# EAGLE board CBMINI (EAGLE 9.5.2)
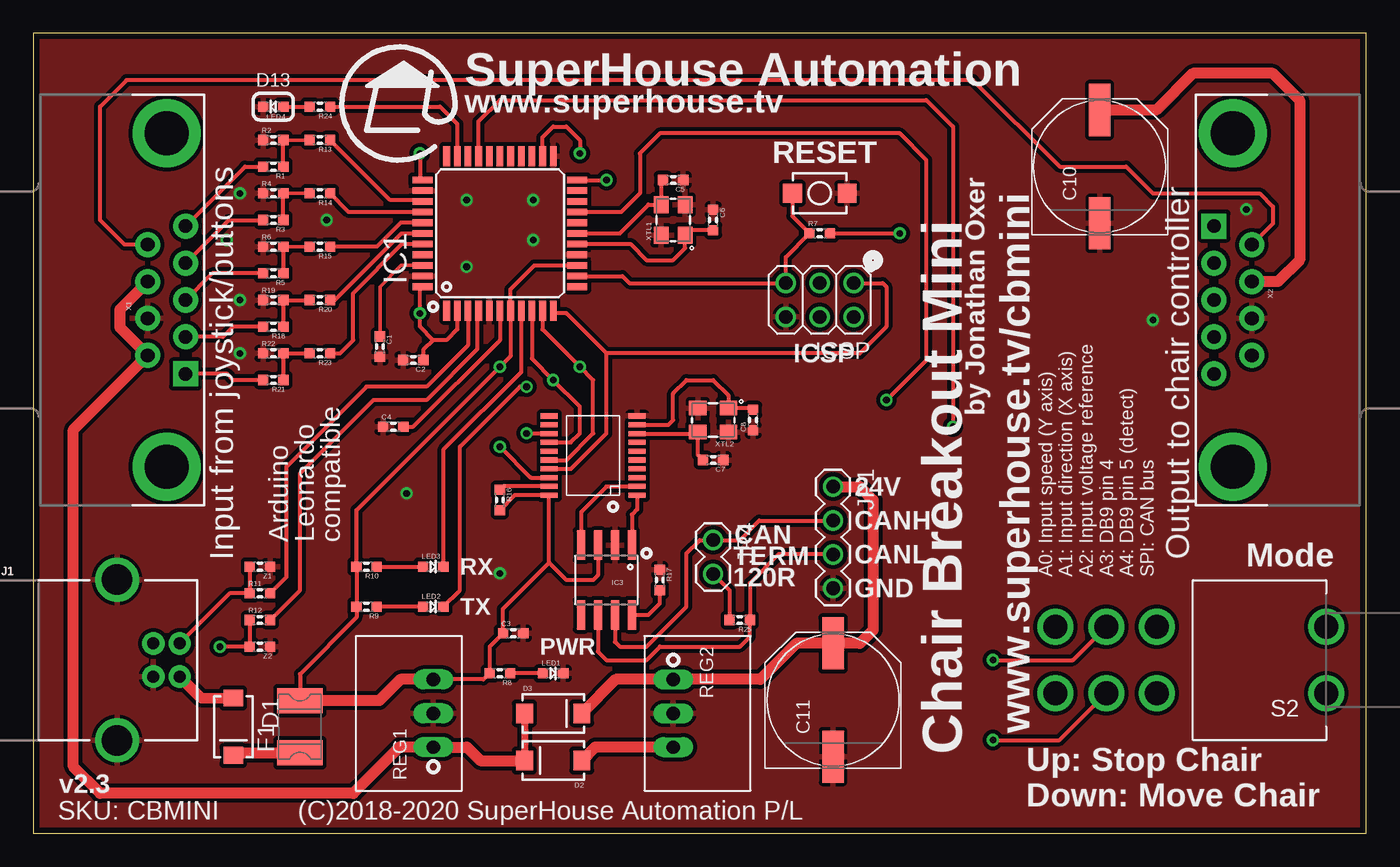
[diagram p0: board, top side]
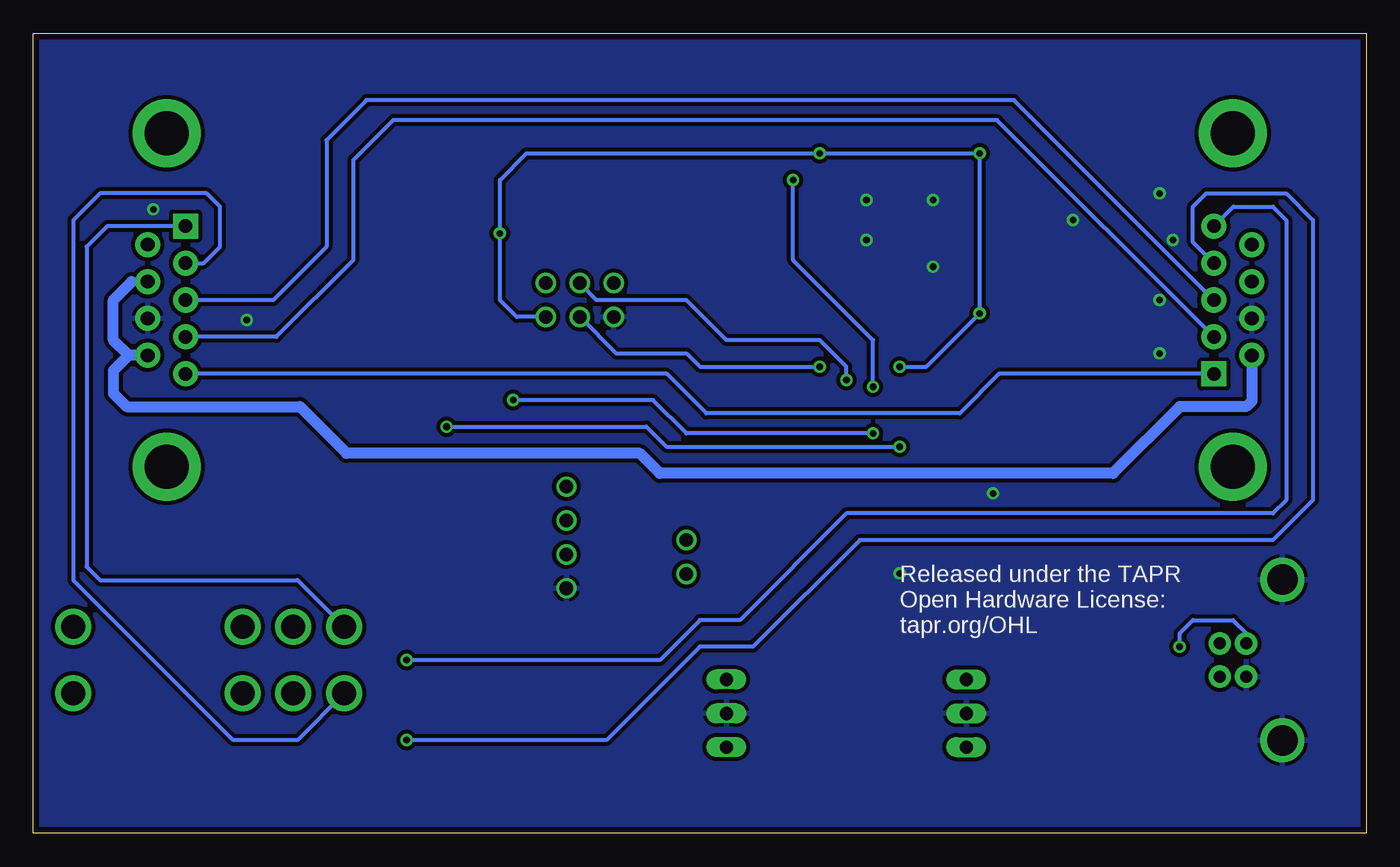
[diagram p1: board, bottom side, seen from below]

Size 100 x 60 mm. Coordinates in mm from the lower left corner, seen from the top.
Outline: 100,60 0,60 0,0 100,0 100,60
Copper layers (1*16): Top 0.035mm / dielectric 1.5mm / Bottom 0.035mm
Design rules "default *": minimum track width 10mil, minimum drill 24mil, track to track 12mil, track to pad 12mil, pad to pad 12mil, via to via 12mil, smd to smd 8mil, copper to edge 18mil, drill to drill 8mil, minimum pad ring 10mil, minimum via ring 8mil, stop-mask expansion 4mil, vias tented up to drill 0mil, thermal gap 10mil

## Footprints (pad centres in the part's own frame; a part is rotated, then mirrored left to right if it is on the bottom)
C0603 = smd 0.762 x 0.762: 1 -0.762,0; 2 0.762,0
PANASONIC_G = smd 3.9 x 1.6: + 4.25,0; - -4.25,0
SMA-DIODE = smd 1.27 x 1.47: A -2.15,0; C 2.15,0
1812 = smd 1.9 x 3.4: 1 -1.95,0; 2 1.95,0
TQFP44 = smd 1.5 x 0.5: 1 -5.8,4; 2 -5.8,3.2; 3 -5.8,2.4; 4 -5.8,1.6; 5 -5.8,0.8; 6 -5.8,0; 7 -5.8,-0.8; 8 -5.8,-1.6; 9 -5.8,-2.4; 10 -5.8,-3.2; 11 -5.8,-4; 23 5.8,-4; 24 5.8,-3.2; 25 5.8,-2.4; 26 5.8,-1.6; 27 5.8,-0.8; 28 5.8,0; 29 5.8,0.8; 30 5.8,1.6; 31 5.8,2.4; 32 5.8,3.2; 33 5.8,4 | smd 0.5 x 1.5: 12 -4,-5.8; 13 -3.2,-5.8; 14 -2.4,-5.8; 15 -1.6,-5.8; 16 -0.8,-5.8; 17 0,-5.8; 18 0.8,-5.8; 19 1.6,-5.8; 20 2.4,-5.8; 21 3.2,-5.8; 22 4,-5.8; 34 4,5.8; 35 3.2,5.8; 36 2.4,5.8; 37 1.6,5.8; 38 0.8,5.8; 39 0,5.8; 40 -0.8,5.8; 41 -1.6,5.8; 42 -2.4,5.8; 43 -3.2,5.8; 44 -4,5.8
TSSOP20 = smd 1.27 x 0.381: 1 -3.302,2.642; 2 -3.302,1.981; 3 -3.302,1.321; 4 -3.302,0.66; 5 -3.302,0; 6 -3.302,-0.66; 7 -3.302,-1.321; 8 -3.302,-1.981; 9 -3.302,-2.642; 10 -3.302,-3.302; 11 3.302,-3.302; 12 3.302,-2.642; 13 3.302,-1.981; 14 3.302,-1.321; 15 3.302,-0.66; 16 3.302,0; 17 3.302,0.66; 18 3.302,1.321; 19 3.302,1.981; 20 3.302,2.642
SO08 = smd 0.61 x 2.21: 1 -1.905,-2.616; 2 -0.635,-2.616; 3 0.635,-2.616; 4 1.905,-2.616; 5 1.905,2.616; 6 0.635,2.616; 7 -0.635,2.616; 8 -1.905,2.616
2X03-ICSP = drill 1.016: 1 -2.54,-1.27; 2 -2.54,1.27; 3 0,-1.27; 4 0,1.27; 5 2.54,-1.27; 6 2.54,1.27
USB-B-PTH = drill 0.914 pad 1.676: D+ 4,1.25; D- 5.981,1.25; GND 4,-1.25; VBUS 5.981,-1.25 | drill 2.286: SHLD1 1.282,-6.02; SHLD2 1.282,6.02
1X04-P = drill 1.016: 1 0,0; 2 2.54,0; 3 5.08,0; 4 7.62,0
1X02-P = drill 1.016: 1 0,0; 2 2.54,0
LED-0603 = smd 0.762 x 0.762: A -0.762,0; C 0.762,0
R0603 = smd 0.762 x 0.762: 1 -0.762,0; 2 0.762,0
K78XX-500R3 = drill 1 long: 1 -2.54,0; 2 0,0; 3 2.54,0
TACTILE_SMT_3X4X2 = smd 1.4 x 1.4: 1 -2.05,0; 2 2.05,0
7201SD9AV2BE = drill 1.8: 1 12.7,-2.5; 2 16.51,-2.5; 3 20.32,-2.5; 4 20.32,2.5; 5 16.51,2.5; 6 12.7,2.5; 7 0,2.5; 8 0,-2.5
DB9-PCB-PLUG = drill 1.016 pad 1.88: 1 5.54,-1.42; 2 2.77,-1.42; 3 0,-1.42; 4 -2.77,-1.42; 6 4.15,1.42; 7 1.38,1.42; 8 -1.38,1.42; 9 -4.15,1.42 | drill 1.016 pad 1.88 square: 5 -5.54,-1.42 | drill 3.302 pad 5.08: G1 -12.5,0; G2 12.5,0
DB9-PCB-SOCKET = drill 1.016 pad 1.88 square: 1 -5.54,-1.42 | drill 1.016 pad 1.88: 2 -2.77,-1.42; 3 0,-1.42; 4 2.77,-1.42; 5 5.54,-1.42; 6 -4.15,1.42; 7 -1.38,1.42; 8 1.38,1.42; 9 4.15,1.42 | drill 3.302 pad 5.08: G1 -12.5,0; G2 12.5,0
CRYSTAL-SMD-3X2 = smd 1.3 x 1.1: 1 -1.15,-0.9; 2 1.15,-0.9; 3 1.15,0.9; 4 -1.15,0.9
TVS0603 = smd 0.762 x 0.762: 1 -0.762,0; 2 0.762,0

## Placement (x,y rotation side)
C1  100nF  [C0603]  26,36.5 270 top
C2  100nF  [C0603]  28.5,35.5 180 top
C3  1uF  [C0603]  36,15 0 top
C4  1uF  [C0603]  27,30.5 0 top
C5  15pF  [C0603]  48,49 180 top
C6  15pF  [C0603]  51,46 270 top
C7  15pF  [C0603]  51,28 180 top
C8  15pF  [C0603]  54,31 90 top
C10  220uF 50V  [PANASONIC_G]  80,50 90 top
C11  220uF 50V  [PANASONIC_G]  60,10 90 top
D1  SS56  [SMA-DIODE]  15,8 270 top
D2  SS56  [SMA-DIODE]  39,5.46 180 top
D3  SS56  [SMA-DIODE]  39,9 0 top
F1  500mA PTC 1812  [1812]  20,8 90 top
IC1  ATMEGA32U4NT-TQFP  [TQFP44]  35,45 90 top
IC2  MCP2515  [TSSOP20]  42,28 180 top
IC3  MCP2551  [SO08]  43,19 180 top
ICSP  ICSP  [2X03-ICSP]  59,40 180 top
J1  USB-B-PTH  [USB-B-PTH]  5,13 0 top
JP1  CAN  [1X04-P]  60,26 270 top
JP4  CAN TERM  [1X02-P]  51,22 270 top
LED1  BLUE  [LED-0603]  39,12 0 top
LED2  RED  [LED-0603]  30,17 0 top
LED3  GREEN  [LED-0603]  30,20 0 top
LED4  GREEN  [LED-0603]  18,54.5 180 top
R1  47K 1%  [R0603]  18,50 180 top
R2  47K 1%  [R0603]  18,52 0 top
R3  47K 1%  [R0603]  18,46 180 top
R4  47K 1%  [R0603]  18,48 0 top
R5  47K 1%  [R0603]  18,42 180 top
R6  47K 1%  [R0603]  18,44 0 top
R7  10K  [R0603]  59,45 0 top
R8  4K7  [R0603]  35,12 180 top
R9  1K  [R0603]  25,17 180 top
R10  1K  [R0603]  25,20 180 top
R11  22R  [R0603]  17,18 0 top
R12  22R  [R0603]  17,16 0 top
R13  1K  [R0603]  21.5,52 180 top
R14  1K  [R0603]  21.5,48 180 top
R15  1K  [R0603]  21.5,44 180 top
R16  10K  [R0603]  35,25 270 top
R17  10K  [R0603]  47,19 270 top
R18  47K 1%  [R0603]  18,38 180 top
R19  47K 1%  [R0603]  18,40 0 top
R20  1K  [R0603]  21.5,40 180 top
R21  47K 1%  [R0603]  18,34 180 top
R22  47K 1%  [R0603]  18,36 0 top
R23  1K  [R0603]  21.5,36 180 top
R24  1K  [R0603]  21.5,54.5 180 top
R25  120R  [R0603]  53,16 180 top
REG1  K7805-500R3  [K78XX-500R3]  30,9 90 top
REG2  K7812-500R3  [K78XX-500R3]  48,9 270 top
S1  RESET  [TACTILE_SMT_3X4X2]  59,48 180 top
S2  SWITCH-DPDT3  [7201SD9AV2BE]  97,13 180 top
X1  INPUT  [DB9-PCB-PLUG]  10,40 90 top
X2  OUTPUT  [DB9-PCB-SOCKET]  90,40 270 top
XTL1  16MHz  [CRYSTAL-SMD-3X2]  48,46 90 top
XTL2  16MHz  [CRYSTAL-SMD-3X2]  51,31 180 top
Z1  PGB1010603  [TVS0603]  17,20 180 top
Z2  PGB1010603  [TVS0603]  17,14 180 top

## Library data of the parts
C1-C8 C10 C11 D1-D3 R1-R25 Z1 Z2 = SuperHouse-DiscreteSemi
F1 = SuperHouse-Fuses
IC1 = SuperHouse-MCUs
IC2 IC3 = SuperHouse-ICs
ICSP J1 JP1 JP4 X2 = SuperHouse-Connectors
LED1-LED4 = SuperHouse-LEDs
REG1 REG2 = SuperHouse-Regulators
S1 S2 = SuperHouse-Switches
X1 = SuperHouse-Connectors; PROD_ID: CONN-09904
XTL1 XTL2 = SuperHouse-Oscillators

## Nets
3V3: C4.2 IC1.6
5V: C2.1 C3.1 F1.2 IC1.2 IC1.7 IC1.14 IC1.24 IC1.34 IC1.44 IC2.20 IC3.3 ICSP.2 R7.2 R8.2 R9.2 R10.2 R16.2 REG1.3
12V: D2.A REG2.3
24V: C11.+ D3.C JP1.1 REG2.1
A0: IC1.36 R13.1
A1: IC1.37 R14.1
A2: IC1.38 R15.1
A3: IC1.39 R20.1
A4: IC1.40 R23.1
A5: IC1.41
AREF: C1.1 IC1.42
CANH: IC3.7 JP1.2 JP4.1
CANL: IC3.6 JP1.3 R25.1
D0: IC1.20
D1: IC1.21
D2_SDA: IC1.19 IC2.13
D3_SCL: IC1.18
D4_A6: IC1.25
D5: IC1.31
D6_A8: IC1.27
D7_AIN0: IC1.1
D8_A9: IC1.28
D9_A10: IC1.29
D10_A11: IC1.30 IC2.18
D11: IC1.12
D12: IC1.26
D13: IC1.32 R24.1
D+: J1.D+ R12.1 Z2.2
D-: J1.D- R11.1 Z1.2
DETECT: R21.2 X1.5 X2.5
DIRECTION_IN: R3.2 S2.5 X1.2
DIRECTION_OUT: S2.4 X2.2
GND: C1.2 C2.2 C3.2 C4.1 C5.1 C6.1 C7.1 C8.1 C10.- C11.- IC1.5 IC1.15 IC1.23 IC1.35 IC1.43 IC2.10 IC3.2 ICSP.6 J1.GND J1.SHLD1 J1.SHLD2 JP1.4 LED1.C LED4.C R2.1 R4.1 R6.1 R17.1 R19.1 R22.1 REG1.2 REG2.2 S1.1 X1.8 X2.8 XTL1.2 XTL1.4 XTL2.2 XTL2.4 Z1.1 Z2.1
HWB: IC1.33
MISO: IC1.11 IC2.17 ICSP.1
MOSI: IC1.10 IC2.16 ICSP.4
N$1: LED4.A R24.2
N$2: R1.1 R2.2 R13.2
N$3: R3.1 R4.2 R14.2
N$4: R5.1 R6.2 R15.2
N$5: LED1.A R8.1
N$7: LED2.A R9.1
N$8: LED3.A R10.1
N$9: IC2.1 IC3.1
N$10: IC2.19 R16.1
N$11: C5.2 IC1.17 XTL1.3
N$12: C6.2 IC1.16 XTL1.1
N$13: IC2.2 IC3.4
N$14: C8.2 IC2.9 XTL2.1
N$16: IC3.8 R17.2
N$17: D1.C F1.1
N$18: C7.2 IC2.8 XTL2.3
N$19: R18.1 R19.2 R20.2
N$20: JP4.2 R25.2
N$21: R21.1 R22.2 R23.2
PIN4: R18.2 X1.4 X2.4
PIN6: X1.6 X2.6
RD+: IC1.4 R12.2
RD-: IC1.3 R11.2
REFERENCE: R5.2 X1.3 X2.3
RESET: IC1.13 ICSP.5 R7.1 S1.2
RXLED_SS: IC1.8 LED3.C
SCK: IC1.9 IC2.14 ICSP.3
SPEED_IN: R1.2 S2.2 X1.1
SPEED_OUT: S2.3 X2.1
TX_LED: IC1.22 LED2.C
USB+: D1.A J1.VBUS
VREF: C10.+ D2.C D3.A REG1.1 X1.7 X1.9 X2.7 X2.9

## Tracks (layer width: path | path; a pad name or v marks a point on that pad's centre or on a via)
3V3
  Top 0.305: C4.2 28.5,30.5 35,37 IC1.6
5V  (via drill 0.5)
  Top 0.305: R16.2 36.12,25.36 IC2.20 38.7,20.3 | IC3.3 42.37,19.36 42,19 40,19 38.7,20.3 | v29,51 29,49.2 IC1.34 | IC1.44 29,40.8 v29,39 29,38 30,37 | IC1.24 38.2,52.2 39,53 40,53 41,52 v41,51 | 30,37 31,37 31.8,37.8 IC1.2 | R7.2 v65,45 | IC1.14 37.6,42.6 35.8,40.8 IC1.7 35.8,35.8 v35,35 24.24,24.24 R10.2 R9.2 24.24,16.19 20,11.95 F1.2 | REG1.3 33.78,11.54 R8.2 34.24,14 C3.1 35.24,16.84 38.7,20.3 | 30,37 29.26,36.26 C2.1
  Top 0.813: REG1.3 27.54,11.54 25.95,9.95 F1.2
  Bottom 0.305: ICSP.2 63.73,38.73 65,40 v65,45 65,49 63,51 v41,51 v29,51 v29,39 33,35 v35,35
12V
  Top 0.813: REG2.3 42.15,6.46 D2.A
24V
  Top 0.813: JP1.1 62,26 63,25 63,15.25 62,14.25 C11.+ 57.25,14.25 54.54,11.54 REG2.1 43.69,11.54 D3.C
A0
  Top 0.305: IC1.36 29.11,47.49 26.77,47.49 R13.1
A1
  Top 0.305: IC1.37 23.66,46.6 R14.1
A2
  Top 0.305: IC1.38 27.56,45.8 25.76,44 R15.1
A3
  Top 0.305: R20.1 22.62,40 27.62,45 IC1.39
A4
  Top 0.305: R23.1 23,36 24,37 24,40.51 27.69,44.2 IC1.40
AREF
  Top 0.254: C1.1 26,41 27.6,42.6 IC1.42
CANH
  Top 0.305: IC3.7 43.63,14.37 44,14 46,14 49,17 49,21 50,22 JP4.1 53,22 54.46,23.46 JP1.2
CANL
  Top 0.305: JP1.3 55.92,20.92 53.76,18.76 R25.1 53.76,14.76 53,14 47,14 46,13 43,13 42.37,13.63 IC3.6
D2_SDA  (via drill 0.5)
  Top 0.305: IC2.13 37.02,29.98 v37,30 | v64,32.5 67,35.5 67,50.5 65,52.5 47,52.5 45.5,51 45.5,48 44.1,46.6 IC1.19
  Bottom 0.305: v64,32.5 53.5,32.5 51,30 v37,30
D10_A11  (via drill 0.5)
  Top 0.305: IC1.30 33.4,53.4 35,55 67,55 69,53 v69,30.5 | v35,29 37.32,26.68 IC2.18
  Bottom 0.305: v35,29 52.5,29 54,30.5 v69,30.5
D13
  Top 0.305: R24.1 30.5,54.5 31.8,53.2 IC1.32
D+  (via drill 0.5)
  Top 0.305: R12.1 Z2.2 v14,14
  Bottom 0.305: v14,14 14,15 13,16 10,16 9,15 J1.D+
D-
  Top 0.305: Z1.2 R11.1 14.73,18 J1.D-
DETECT
  Top 0.305: R21.2 15,34 14.54,34.46 X1.5
  Bottom 0.305: X1.5 27.54,34.46 30.5,31.5 49.5,31.5 52.46,34.46 X2.5
DIRECTION_IN  (via drill 0.5)
  Top 0.305: X1.2 14.65,46 R3.2 | S2.5 76.99,7 v72,7
  Bottom 0.305: X1.2 13,44.35 13,47 12,48 6,48 4,46 4,25 7,22 38,22 46,14 50,14 57,7 v72,7
DIRECTION_OUT
  Bottom 0.305: X2.2 87.23,42.77 86,44 86,47 87,48 95,48 97,46 97,19 85,7 80.18,7 S2.4
GND  (via drill 0.5)
  other vias: 32.5,47.5 32.5,42.5 37.5,47.5 37.5,44.5 15.5,48 22,46 28,25.5 84,38.5 14.5,44.5 15.5,40 15.5,36 91,46.8 35,19.5
  pour Bottom: 100,0 0,0 0,60 100,60
  pour Top: 100,0 0,0 0,60 100,60
MISO
  Top 0.305: 43,36 43,30 40.34,27.34 IC2.17 | ICSP.1 63.73,41.27 64,41 64,38 62,36 43,36 | IC1.11 39.2,39 40,39 43,36
MOSI  (via drill 0.5)
  Top 0.305: IC2.16 40,28 42,30 42,34 v41,35 38.2,37.8 IC1.10
  Bottom 0.305: ICSP.4 56.27,36 51,36 50,35 v41,35
N$1
  Top 0.305: LED4.A R24.2
N$2
  Top 0.254: R2.2 R13.2
  Top 0.305: R1.1 R2.2
N$3
  Top 0.254: R4.2 R14.2
  Top 0.305: R3.1 R4.2
N$4
  Top 0.254: R6.2 R15.2
  Top 0.305: R6.2 R5.1
N$5
  Top 0.305: LED1.A R8.1
N$7
  Top 0.305: LED2.A R9.1
N$8
  Top 0.305: R10.1 LED3.A
N$9
  Top 0.305: IC3.1 44.91,23.91 45.3,24.3 IC2.1
N$10
  Top 0.305: IC2.19 35.26,26.02 R16.1
N$11
  Top 0.305: C5.2 47.1,48.86 XTL1.3 46.15,47.15 44,45 IC1.17
N$12
  Top 0.305: C6.2 49.29,45.24 XTL1.1 48.9,43.9 48,43 46,43 44.8,44.2 IC1.16
N$13
  Top 0.305: IC3.4 41.09,24.09 43.01,26.01 45.29,26.01 IC2.2
N$14
  Top 0.305: C8.2 53.86,31.9 XTL2.1 52.15,32.85 51,34 49,34 48,33 48,31 47.64,30.64 IC2.9
N$16
  Top 0.305: IC3.8 46.15,16.38 47,17.24 R17.2
N$17
  Top 0.813: D1.C 15.25,6.05 F1.1
N$18
  Top 0.305: C7.2 49.85,28.39 XTL2.3 49.73,29.98 IC2.8
N$19
  Top 0.305: R18.1 R19.2 R20.2
N$20
  Top 0.305: JP4.2 52.24,18.22 R25.2
N$21
  Top 0.305: R23.2 R22.2 R21.1
PIN4
  Top 0.305: R18.2 15,38 14.23,37.23 X1.4
  Bottom 0.305: X2.4 81.77,37.23 76,43 76,50.5 73,53.5 27.69,53.5 X1.4
PIN6
  Top 0.305: X1.6 6.85,44.15 5,46 5,54.5 7,56.5 70.5,56.5 77,50 82,50 84,48 92,48 93,47 93,45.73 X2.6
RD+
  Top 0.305: R12.2 20,18.24 20,27 25.5,32.5 29.5,32.5 33.31,36.31 33.31,39.11 IC1.4
RD-
  Top 0.305: R11.2 19,19.24 19,27.5 25,33.5 29.5,33.5 32.6,36.6 IC1.3
REFERENCE
  Top 0.305: R5.2 13.42,42 X1.3
  Bottom 0.305: X2.3 82,40 78,44 78,52 75,55 26.42,55 X1.3
RESET
  Top 0.305: S1.2 56.95,46.29 R7.1 56.46,43.22 ICSP.5 44.73,41.27 44.2,41.8 IC1.13
RXLED_SS
  Top 0.305: LED3.C 30.76,28.76 36.6,34.6 IC1.8
SCK  (via drill 0.5)
  Top 0.305: IC2.14 40.32,29.32 41,30 41,32 v39,34 37.4,35.6 IC1.9
  Bottom 0.305: ICSP.3 57.73,40 51,40 48,37 41,37 39,35 v39,34
SPEED_IN  (via drill 0.5)
  Top 0.305: X1.1 15.88,50 R1.2 | S2.2 77.99,13 v72,13
  Bottom 0.305: X1.1 9.96,47 7,47 6,46 6,25 7,24 39,24 47,16 50,16 53,13 v72,13
SPEED_OUT
  Bottom 0.305: X2.1 90.83,45.54 90.84,45.55 94.45,45.55 96,44 96,20 95,19 80.18,19 S2.3
TX_LED  (via drill 0.5)
  Top 0.305: LED2.C 32,18.24 32,29 36.5,33.5 v37,33.5 | IC1.22 v43,49
  Bottom 0.305: v37,33.5 37,37 43,43 v43,49
USB+
  Top 0.813: J1.VBUS 12.55,10.18 D1.A
VREF
  Top 0.508: D3.A D2.C
  Top 0.813: C10.+ 84.25,54.25 87,57 93,57 95,55 95,43 93.38,41.38 X2.7 | X1.7 6.5,39.3 6.5,37.93 X1.9 3,30.27 3,5 5,3 24,3 27.46,6.46 REG1.1 32.54,6.46 33.54,5.46 D2.C
  Bottom 0.61: X2.7 92.62,41.38
  Bottom 0.813: X1.9 8.58,32.42 9,32 14,32 19,27 53,27 54.5,28.5 76.5,28.5 80,32 93,32 94,33 94,34.7 92.85,35.85 | 92.62,41.38 94,40 94,37 92.85,35.85 | X2.9 92.85,35.85

## Text on the board
tPlace: D13 | SuperHouse Automation | www.superhouse.tv | RESET | ICSP | by Jonathan Oxer | 24V | CANH | Arduino / Leonardo / compatible | CAN | TERM | CANL | Output to chair controller | Input from joystick/buttons | RX | Mode | 120R | A0: Input speed (Y axis) / A1: Input direction (X axis) / A2: Input voltage reference / A3: DB9 pin 4 / A4: DB9 pin 5 (detect) / SPI: CAN bus | GND | TX | PWR | www.superhouse.tv/cbmini | Chair Breakout Mini | v2.3 | Up: Stop Chair / Down: Move Chair | SKU: CBMINI | (C)2018-2020 SuperHouse Automation P/L
bPlace: Released under the TAPR / Open Hardware License: / tapr.org/OHL